# EAGLE board BLINKY CIRCLE CONNECTOR REV B (EAGLE 7.5.0)
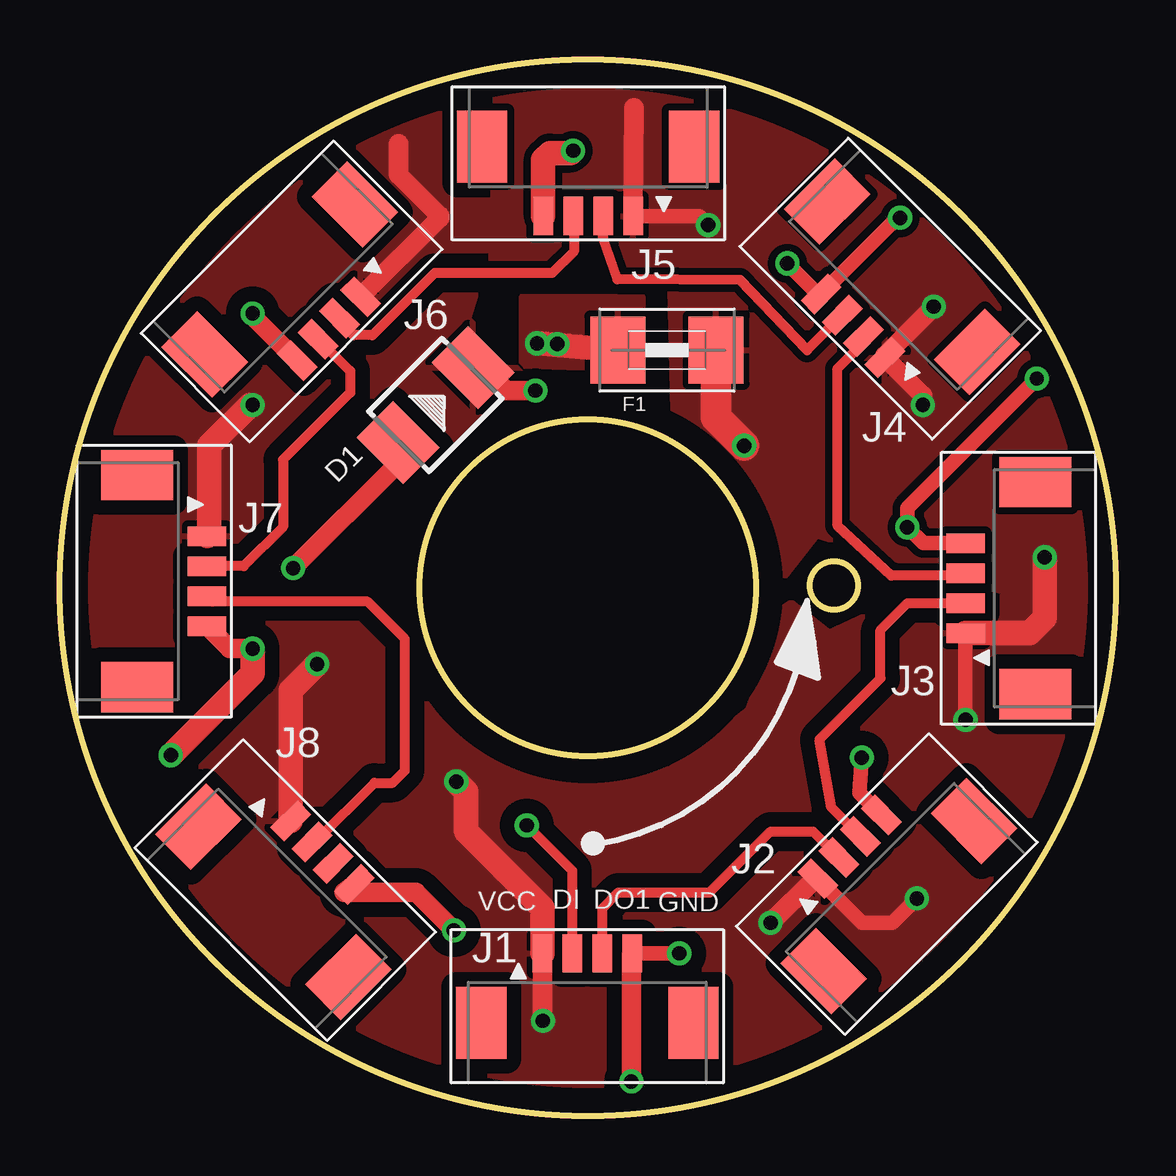
[diagram p0: board, top side]
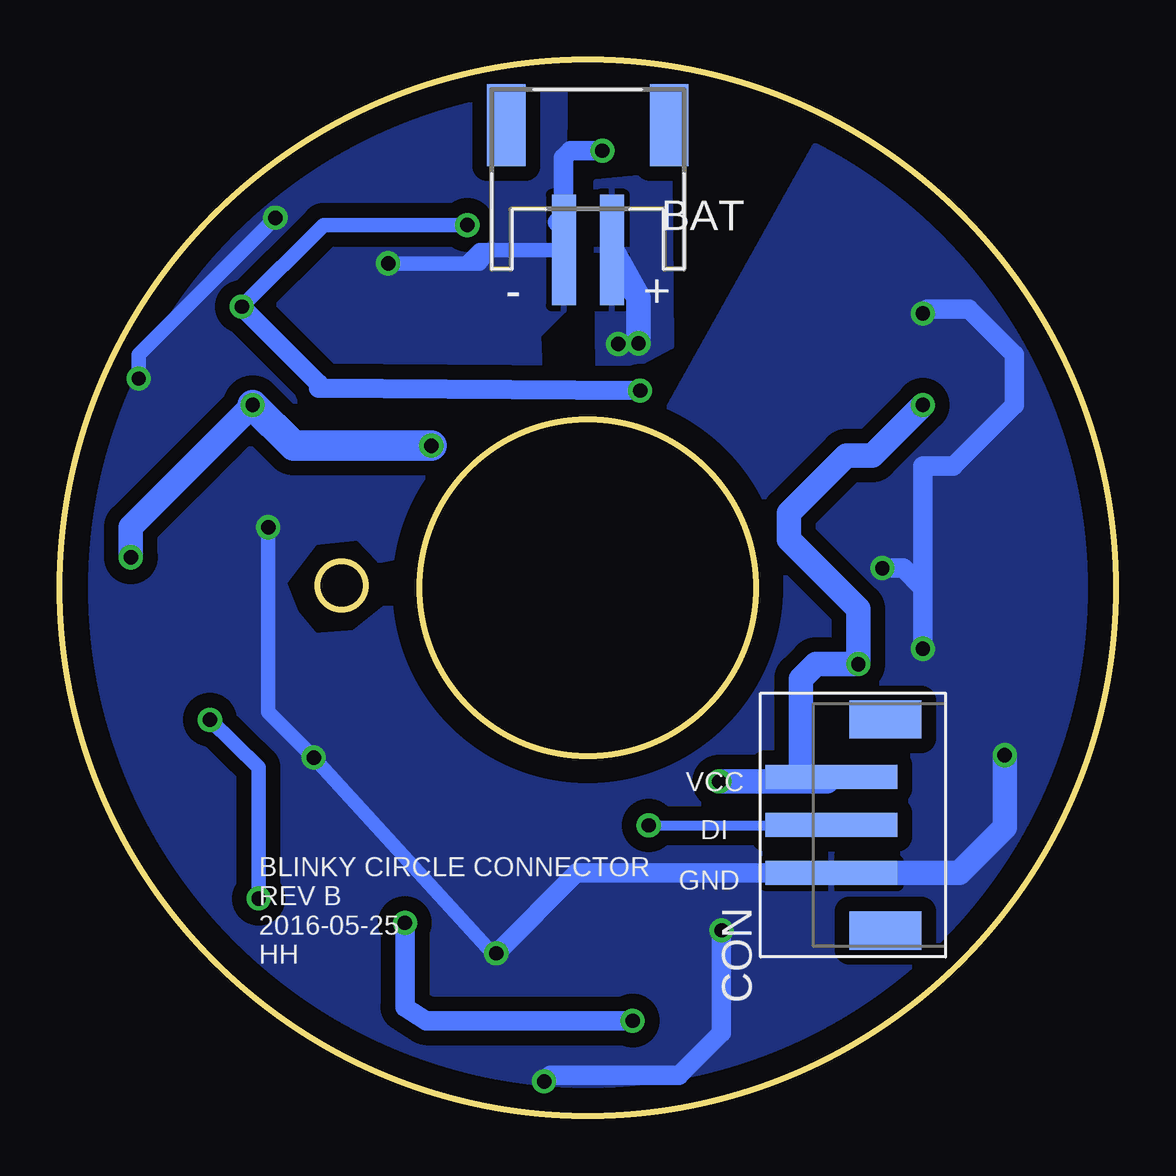
[diagram p1: board, bottom side, seen from below]

Size 44 x 44 mm. Coordinates in mm from the lower left corner, seen from the top.
Outline: circle at 22,22 radius 7
Outline: circle at 22,22 radius 22
Copper layers (1*16): Top 0.035mm / dielectric 1.5mm / Bottom 0.035mm
Design rules "default *": minimum track width 5mil, minimum drill 10mil, track to track 8mil, track to pad 8mil, pad to pad 8mil, via to via 8mil, smd to smd 8mil, copper to edge 40mil, drill to drill 8mil, minimum pad ring 10mil, minimum via ring 8mil, stop-mask expansion 4mil, vias tented up to drill 0mil, thermal gap 10mil
Net classes: 0 default: clearance 0.205 mm
Milling: area 0,0 to 44,44; area 31.3,21.1 to 33.3,23.1; area 15,15 to 29,29

## Footprints (pad centres in the part's own frame; a part is rotated, then mirrored left to right if it is on the bottom)
JST-PH-2-SMT-RA = smd 1 x 4.6: 1 1,-3.7; 2 -1,-3.7 | smd 1.6 x 3.4: NC1 -3.4,1.5; NC2 3.4,1.5
620303124022 = smd 1 x 5.5: 1 1,0; 2 -1,0; 3 -3,0 | smd 1.6 x 3: Z1 3.4,-2.25; Z2 -5.4,-2.25
DO-214AA = smd 2.159 x 2.743: + -2.21,0; - 2.21,0
1812 = smd 2.286 x 2.794: 1 -2.046,0; 2 2.046,0
653104131822 = smd 0.81 x 1.6: 1 -0.625,0; 2 0.625,0; 3 1.875,0; 4 3.125,0 | smd 2.1 x 3: Z1 -3.175,-2.9; Z2 5.675,-2.9

## Placement (x,y rotation side)
BAT  [JST-PH-2-SMT-RA]  22,39.78 0 bottom
CON  620303124022  [620303124022]  11.84,13.11 90 bottom
D1  28V-5A  [DO-214AA]  15.65,29.62 45 top
F1  [1812]  25.3,31.91 0 top
J1  653104131822  [653104131822]  20.73,6.76 0 top
J2  653104131822  [653104131822]  32.03,10.32 45 top
J3  653104131822  [653104131822]  37.75,20.73 90 top
J4  653104131822  [653104131822]  33.94,32.03 135 top
J5  653104131822  [653104131822]  23.27,37.49 180 top
J6  653104131822  [653104131822]  12.09,33.68 225 top
J7  653104131822  [653104131822]  6.12,23.52 270 top
J8  653104131822  [653104131822]  10.06,11.84 315 top

## Library data of the parts
BAT F1 = adafruit
CON = Wire_to_Board_Connectors_rev15d
D1 = Seeed-OPL-Diode; MPN: SS54B
J1-J8 = wire to board connectors-hh

## Nets
BAT+: BAT.1 F1.1
DI: CON.2 J1.2
DO1: J1.3 J2.2
DO2: J2.3 J3.2
DO3: J3.3 J4.2
DO5: J5.3 J6.2
DO6: J6.3 J7.2
DO7: J7.3 J8.2
GND: BAT.2 CON.3 D1.+ J1.4 J2.4 J3.4 J4.4 J5.4 J6.4 J7.4 J8.4
N$1: J4.3 J5.2
VCC: CON.1 D1.- F1.2 J1.1 J2.1 J3.1 J4.1 J5.1 J6.1 J7.1 J8.1

## Tracks (layer width: path | path; a pad name or v marks a point on that pad's centre or on a via)
BAT+  (via drill 0.6)
  Top 1.016: v19.89,32.19 22.66,31.95 F1.1
  Bottom 1.016: BAT.1 19.89,34.1 v19.89,32.19
  other vias: 20.73,32.16
  pour Top (isolate 0.406): 19.27,34.15 24.28,34.14 24.26,31.08 19.26,31.25
  pour Bottom (isolate 0.61): 18.52,32.07 18.58,39.19 21.65,38.91 21.57,30.94 21.21,30.93 20.73,30.89
DI  (via drill 0.6)
  Top 0.406: J1.2 21.36,10.2 v19.46,12.09
  Bottom 0.406: v19.46,12.09 11.86,12.09 CON.2
DO1
  Top 0.406: J1.3 22.61,8.63 23.27,9.3 27.08,9.3 29.62,11.84 31.39,11.84 J2.2
DO2
  Top 0.406: J2.3 32.16,12.84 31.66,15.68 34.2,18.22 34.2,20.23 35.33,21.36 J3.2
DO3
  Top 0.406: J3.3 37.65,22.51 34.65,22.51 32.41,24.59 32.41,31.14 33.5,32.23 J4.2
DO5
  Top 0.406: J5.3 21.49,37.4 21.42,37.33 21.42,36.02 20.52,35.12 15.62,35.12 13.03,32.53 12.23,32.53 11.65,33.11 | 11.51,33.25 11.65,33.11 | 11.65,33.11 J6.2
DO6
  Top 0.406: J6.3 12.09,31.03 12.09,30.13 9.3,27.33 9.3,24.54 7.66,22.9 J7.2
DO7
  Top 0.406: J8.2 10.64,11.4 13.11,13.87 13.87,13.87 14.38,14.38 14.38,19.86 12.82,21.42 6.35,21.42 J7.3
GND  (via drill 0.6)
  Top 0.61: J1.4 v25.81,6.76 | v33.42,14.92 33.32,13.45 J2.4 | J3.4 35.98,23.86 v35.32,24.52 35.32,25.32 v40.72,30.72 | v30.32,35.52 31.6,34.24 J4.4 34.91,37.42 v35.02,37.42
  Top 0.813: J8.4 11.84,9.3 14.84,9.3 v16.42,7.72 | v23.82,1.42 23.82,6.72 J1.4 | J7.4 7.06,19.46 v8.03,19.46 | v8.03,33.43 8.03,33.33 J6.4 | D1.+ 14.09,27.19 v9.72,22.82 | 21.29,40.12 v21.39,40.22
  Top 1.016: J5.4 20.14,39.84 20.42,40.12 21.29,40.12 | v8.03,19.46 8.03,18.43 v4.62,15.02
  Bottom 0.61: v25.81,6.76 25.96,6.76 v33.42,14.92 35.32,16.82 v35.32,24.52 | v30.32,35.52 27.08,35.52 | 27.08,35.52 26.52,35.52 26.12,36.02 | BAT.2 26.52,36.08 27.08,35.52 | v40.72,30.72 40.72,31.72 v35.02,37.42
  Bottom 0.813: v16.42,7.72 16.42,3.45 18.19,1.68 23.56,1.68 v23.82,1.42 | CON.3 22.46,10.11 v25.81,6.76 | v8.03,19.46 8.03,22 | 8.03,22 8.03,27.08 6.76,27.08 4.22,29.62 4.22,31.72 6.12,33.62 7.84,33.62 v8.03,33.43 | v9.72,22.82 8.85,22.82 8.03,22 | v21.39,40.22 22.72,40.22 23.02,39.92 23.02,37.49 23.27,37.24
  Bottom 1.016: v4.62,15.02 4.62,12.02 6.52,10.12 CON.3
  pour Bottom (isolate 0.61): 24.9,31.06 25.16,30.26 27.28,27.64 29.84,23.31 30.68,23.14 31.58,24.07 33.38,23.88 34.68,22.2 34.2,21 33.38,20.02 31.71,20.13 30.44,21.16 29.36,21.1 28.57,17.78 25.82,15.56 22.16,14.45 18.14,15.43 15.58,18.06 14.22,21.13 14.76,24.1 16.34,27.33 18.93,28.97 12.04,41.31 8.78,39.38 5.11,35.81 1.89,30.97 0.18,24.29 0.63,16.86 3.79,9.87 9.89,3.86 17.67,0.69 27.37,0.82 35.47,4.74 41.19,11.7 43.78,20.5 43.02,27.33 39.58,34.79 35.21,39.41 31.86,41.34 29.33,42.61 26.87,43.11 22.97,43.59 23.01,33.57 24.08,32.51 24.01,31.04
N$1
  Top 0.406: J4.3 32.6,33.36 31.14,31.91 28.35,34.83 23.23,34.86 22.64,36.59 J5.2
VCC  (via drill 0.6)
  Top 0.61: J5.1 26.65,37.49 v27.02,37.12 | v36.42,33.72 36.42,33.63 | J2.1 33.44,8.03 34.7,8.03 v35.72,9.05 | v37.75,16.49 J3.1
  Top 0.813: v35.97,29.62 35.97,30 J4.1 34.38,31.68 v36.42,33.72 | J2.1 31.46,9.87 v29.62,8.03 | v20.13,3.95 20.11,3.88 J1.1 | J5.1 23.92,42.02 | 14.12,40.52 14.12,39.22 15.82,37.52 15.82,37.41 J6.1 | D1.- 17.56,31.18 18.62,30.22 v19.82,30.22
  Top 1.016: J3.1 40.42,20.11 41.05,20.73 v41.05,23.27 | J1.1 20.11,8.66 16.92,11.84 16.92,13.52 v16.52,13.92 | J8.1 9.62,17.72 v10.72,18.82 | v8.03,29.62 7.92,29.62 6.22,27.92 6.22,24.24 J7.1
  Top 1.27: F1.2 27.35,29.09 v28.52,27.92
  Bottom 0.61: v27.02,37.12 33.02,37.12 v36.42,33.72 | v35.72,9.05 35.72,14.52 v37.75,16.49
  Bottom 0.813: v29.62,8.03 29.62,4.52 28.75,3.95 v20.13,3.95 | v19.82,30.22 33.21,30.32 33.21,30.51 v36.42,33.72
  Bottom 1.016: v41.05,23.27 41.05,24.54 v35.97,29.62 | v16.52,13.92 13.11,13.92 | 13.11,13.92 12.03,13.92 CON.1 | 13.11,13.92 13.11,18.19 12.48,18.82 v10.72,18.82 10.72,21.12 13.62,24.02 13.62,25.12 11.22,27.52 10.13,27.52 v8.03,29.62
  Bottom 1.27: v28.52,27.92 34.27,27.92 v35.97,29.62
  pour Top (isolate 0.305): 18.19,43.59 17.95,35.01 25.4,35.33 25.56,29.35 20.52,29.48 20.52,28.92 22.02,29.02 24.12,28.72 25.92,27.82 27.72,26.12 28.92,23.62 28.92,20.82 31.55,24.17 44.02,20.42 43.92,24.32 42.42,30.42 39.32,35.52 35.22,39.72 31.12,42.02 27.42,43.42 22.32,43.92 20.02,43.82 19.46,43.59
  pour Top (isolate 0.61): 29.11,20.47 30.47,21.4 32.08,20.13 33.95,21.01 34.12,22.81 34.86,22.75 44.11,20.41 43.73,17.82 42.62,14.22 40.25,9.3 36.69,5.59 30.99,1.85 25.62,0.37 21.14,-0.07 16.33,0.63 11,3.04 6.85,6.19 3,10.82 0.44,17.63 0,24.11 1.26,28.89 3.37,33.44 6.59,37.67 11.85,41.33 16.51,43.11 15.05,41.95 14.97,29.09 14.85,26.19 13.92,24.07 14.11,19.15 16.18,16.22 20.22,13.78 24.81,13.96 28.69,16.93 29.81,19.82 29.4,19.93
  pour Top (isolate 0.61): 13.11,42.32 19.46,43.59 19.46,39.78 27.08,39.78 27.08,35.97 17.84,35.88 17,33.21 19.32,30.87 17.63,29.19 14.99,25.58 14.52,21.99 15.01,19.14 16.4,16.88 18.97,14.99 21.51,14.34 25.33,15.05 25.63,0.79 20.26,0.28 13.26,2.01 6.39,6.99 1.24,15.18 0.24,21.29 1.04,27.78 4.42,34.98 9.84,40.07 11.64,41.24

## Text on the board
tPlace: VCC | DI | DO1 | GND
bPlace: VCC | DI | GND | BLINKY CIRCLE CONNECTOR / REV B / 2016-05-25 / HH
Document: REMARKS: / FOR BIINKY UMBRELLA / 8 STRIPS CONNECTORS / R=22mm, r=7mm | Rev B modify the BAT+ and the VCC / clearenc to solve the isolation of Rev A
204bmp: 厚2mm / 中间14mm的圆孔开通 / 两个长方形只钻通一半
205bmp: 厚度0.5mm / 中间小圆开孔，2mm小圆孔